# Altium PCB LEGO_VL53L1X_Sensor.PcbDoc
Units mm, origin at the board's own origin, x right, y up, seen from the top; angles counter-clockwise.
Board outline 20 x 20 mm, 2 copper layers (Top, Bottom), stack 1.036 mm thick; 56 components, 45 nets, 215 pads, 59 vias.
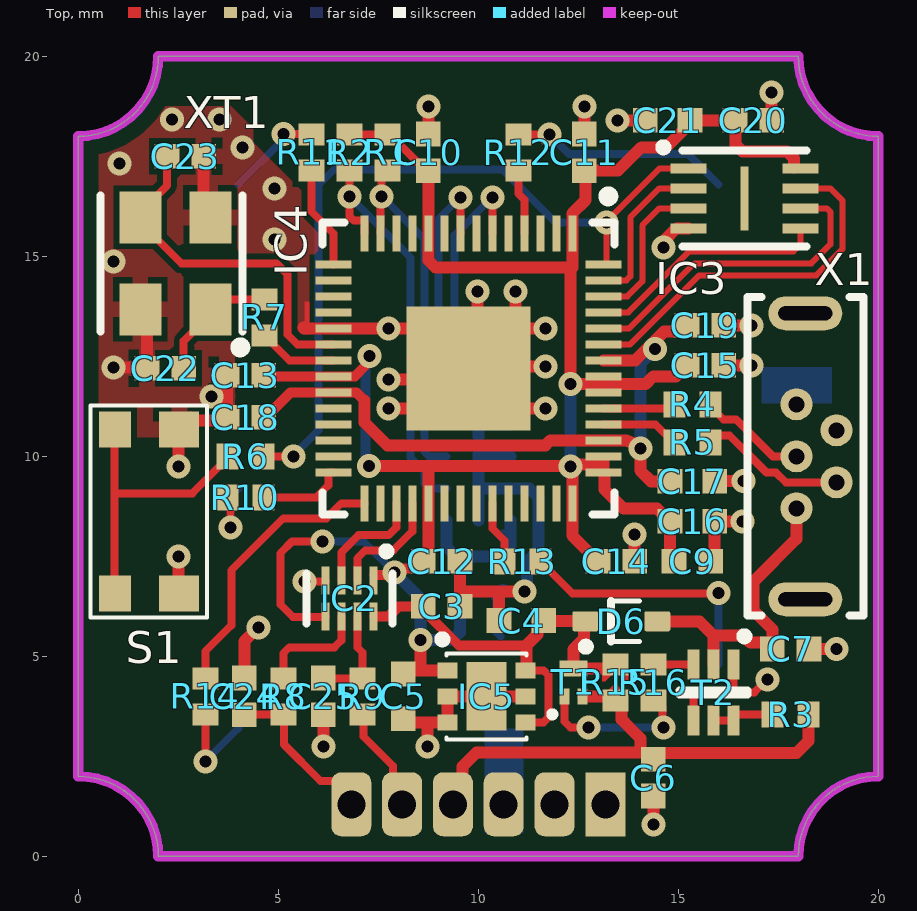
[diagram p0: Top view]
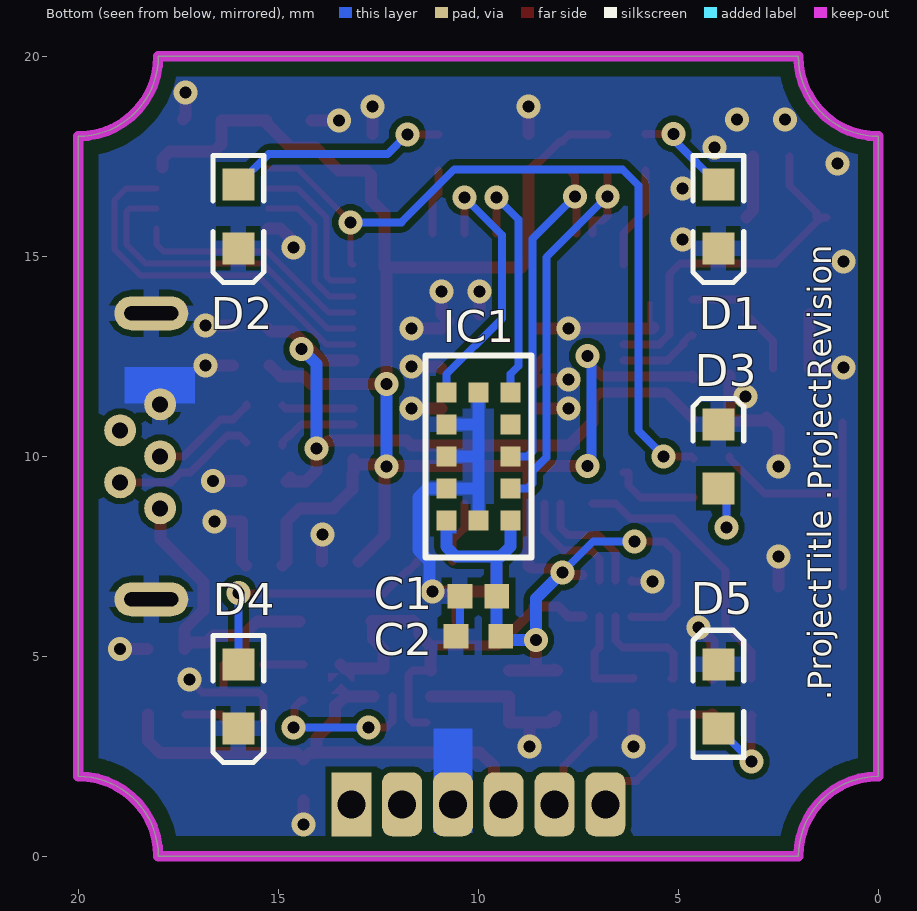
[diagram p1: Bottom view, seen from below]
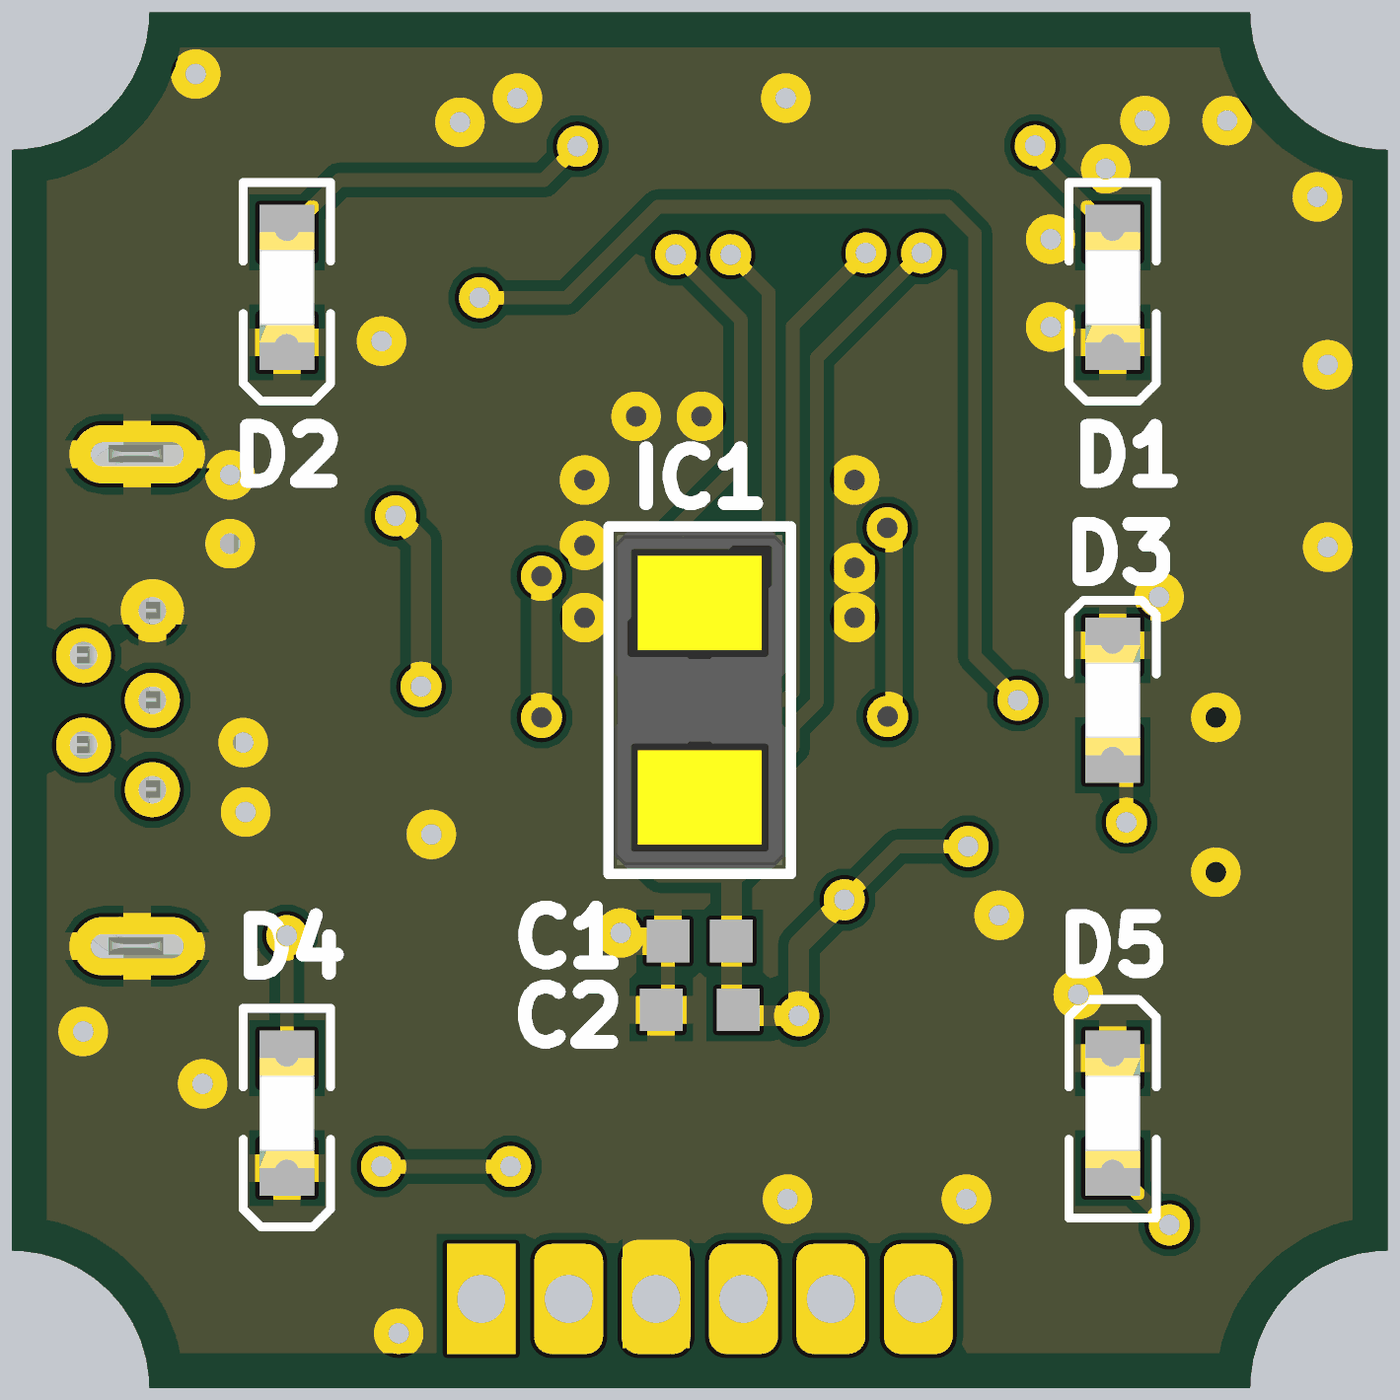
[diagram p2: 3D render of the assembled board from below, using the file's embedded part models]

## Layer stack, top to bottom
Top Solder: solder mask 0.01, Solder Resist, Dk 3.5
Top: signal copper 0.018
Dielectric 1: core 1, FR-4, Dk 4.8
Bottom: signal copper 0.018
Bottom Solder: solder mask 0.01, Solder Resist, Dk 3.5

## Board outline
0,2 0,18 ccw(c0,20) 2,20 18,20 ccw(c20,20) 20,18 20,2 ccw(c20,0) 18,0 2,0 ccw(c0,0)

## Design rules (kind name [scope] priority, off if disabled: settings)
BoardOutlineClearance BoardOutlineClearance_Overlay [OnLayer('Top Overlay')] p1: gap=0.2 ignorepadtopadclearanceinfootprint=FALSE
BoardOutlineClearance [All] p2: gap=0.5 ignorepadtopadclearanceinfootprint=FALSE
Clearance Clearance_Fiducial [HasFootprint('RefPoint_Square1mm') OR HasFootprint('RefPoint_Round1mm')] p1: gap=1.1 ignorepadtopadclearanceinfootprint=FALSE
Clearance [All] p2: gap=0.15 ignorepadtopadclearanceinfootprint=FALSE
ComponentClearance ComponentClearance_CON [HasFootprint('HDR1X2-3_5mm') or HasFootprint('HDR1X3-3_5mm')] p1: gap=0 collisioncheckmode=3 verticalgap=0 showdistances=FALSE
ComponentClearance [All] p2: gap=0.254 collisioncheckmode=3 verticalgap=0.254 showdistances=FALSE
DiffPairsRouting [All] p1: maxlimit=0.2 minlimit=0.2 mostfreqgap=0.2 toplayer_minwidth=0.2 toplayer_maxwidth=0.2 toplayer_prefwidth=0.2 bottomlayer_minwidth=0.2 bottomlayer_maxwidth=0.2 bottomlayer_prefwidth=0.2 maxuncoupledlength=12.7
HoleSize [All] p1: absolutevalues=TRUE maxlimit=12 minlimit=0.025 maxpercent=80.000 minpercent=20.000
HoleToHoleClearance mdViaViaSameLayer [All] p1: gap=0.203 allowstackedmicrovias=TRUE
HoleToHoleClearance [All] p2: gap=0.254 allowstackedmicrovias=TRUE
MinimumAnnularRing [All] p1: minimumring=0.15
MinimumSolderMaskSliver [All] p1: minsoldermaskwidth=0.05
PasteMaskExpansion mlMinCreamFrame [All] p1: expansion=0
PasteMaskExpansion [All] p2: expansion=0
PolygonConnect PolygonConnect_USB [HasFootprint('MICRO_USB_FCI')] p1: connectstyle=Direct reliefconductorwidth=0.254 reliefentries=4 polygonreliefangle="90 Angle" airgapwidth=0.254
PolygonConnect ThermalVias [IsVia] p2: connectstyle=Direct reliefconductorwidth=0.254 reliefentries=4 polygonreliefangle="90 Angle" airgapwidth=0.254
PolygonConnect [All] p3: connectstyle=Relief reliefconductorwidth=0.4 reliefentries=4 polygonreliefangle="90 Angle" airgapwidth=0.15
RoomDefinition U_power [InComponentClass('U_power')] p1: confinementstyle=ConfineIn formatcopy=TRUE lockcomponents=FALSE outline -43.125,-37.125 97.275,-37.125 97.275,117.125 -43.125,117.125
RoomDefinition U_MCU [InComponentClass('U_MCU')] p2: confinementstyle=ConfineIn formatcopy=TRUE lockcomponents=FALSE outline -51,-44 91.5,-44 91.5,111 -51,111
RoomDefinition LEGO_VL53L1X_Sensor [InComponentClass('LEGO_VL53L1X_Sensor')] p3: confinementstyle=ConfineIn formatcopy=TRUE lockcomponents=FALSE outline -54.5,-47 88,-47 88,108 -54.5,108
RoomDefinition U_VL53L1X [InComponentClass('U_VL53L1X')] p4: confinementstyle=ConfineIn formatcopy=TRUE lockcomponents=FALSE outline -46,-39.48 -46,114.5 95,114.5 95,-40.5
RoutingVias [All] p1: holewidth=0.711 width=1.27 viastyle="Through Hole" minholewidth=0.25 minwidth=0.55 maxholewidth=0.9 maxwidth=1.6
SMDEntry [All] p1 off: side=TRUE corner=TRUE anyangle=FALSE
SMDToCorner [All] p1 off: distance=59055
SilkToSilkClearance [All] p1 off: silktosilkclearance=0.05
SilkToSolderMaskClearance [IsPad] p1 off: minsilkscreentomaskgap=0.05 clearancetoexposedcopper=TRUE
SolderMaskExpansion IsVia [IsVia] p1: expansion=0.1 istentingtop=FALSE soldermaskfromhole=TRUE
SolderMaskExpansion [All] p2: expansion=0.06 istentingtop=FALSE
Width [All] p1: maxlimit=3 minlimit=0.15 preferedwidth=0.2 minimp=50.000000 maximp=50.000000 favimp=50.000000
22 further rules are at their usual default settings.

## Classes and differential pairs
component class U_power: C4 C5 C6 C7 D6 IC5 R3 R15 R16 T1 T2
differential pair class diff_90ohm: CON_USB MCU_USB
net class single_50ohm: CON_USB_N CON_USB_P MCU_USB_N MCU_USB_P
component class U_VL53L1X: C1 C2 IC1
component class U_MCU: C9 C10 C11 C12 C13 C14 C15 C16 C17 C18 C19 C20 C21 C22 C23 IC3 IC4 R1 R2 R4 R5 R6 R7 XT1
component class LEGO_VL53L1X_Sensor: C3 C24 C25 D1 D2 D3 D4 D5 IC2 R8 R9 R10 R11 R12 R13 R14 S1 X1
differential pair MCU_USB: +MCU_USB_P -MCU_USB_N
differential pair CON_USB: +CON_USB_P -CON_USB_N

## Components (designator, comment, footprint, x,y, rotation, side; value= is the part's Value field where it differs from the comment)
C1 "UniversalCapacitor" C0402 10,6.5 r180 bottom value="100nF 25V"
C2 "4.7uF/10V" C0402_big 10,5.5 r0 bottom
C3 "UniversalCapacitor" C0402 9.085,6.25 r180 top value="100nF 25V"
C4 "UniversalCapacitor" C0402_big 11.075,5.894 r180 top value=4.7uF/10V
C5 "UniversalCapacitor" C0402_big 8.125,4 r270 top value=4.7uF/10V
C6 "UniversalCapacitor" C0402 14.375,1.965 r90 top value="100nF 25V"
C7 "UniversalCapacitor" C0402 17.81,5.186 r180 top value="100nF 25V"
C9 "UniversalCapacitor" C0402 15.35,7.375 r180 top value="100nF 25V"
C10 "UniversalCapacitor" C0402 8.75,17.6 r270 top value="100nF 25V"
C11 "UniversalCapacitor" C0402 12.65,17.6 r270 top value="100nF 25V"
C12 "UniversalCapacitor" C0402 9.085,7.375 r180 top value="100nF 25V"
C13 "UniversalCapacitor" C0402 4.175,12.025 r0 top value="100nF 25V"
C14 "UniversalCapacitor" C0402 13.45,7.375 r180 top value="100nF 25V"
C15 "UniversalCapacitor" C0402 15.675,12.275 r180 top value="100nF 25V"
C16 "4.7uF/10V" C0402_big 15.35,8.375 r0 top
C17 "4.7uF/10V" C0402_big 15.35,9.375 r0 top
C18 "UniversalCapacitor" C0402 4.175,10.975 r0 top value="100nF 25V"
C19 "UniversalCapacitor" C0402 15.675,13.275 r180 top value="100nF 25V"
C20 "UniversalCapacitor" C0402 16.875,18.4 r180 top value="100nF 25V"
C21 "4.7uF/10V" C0402_big 14.735,18.4 r180 top
C22 "UniversalCapacitor" C0402 2.175,12.2 r180 top value="27pF 50V"
C23 "UniversalCapacitor" C0402 2.675,17.5 r0 top value="27pF 50V"
C24 "UniversalCapacitor" C0402 4.15,4 r90 top value="10pF / 50V"
C25 "UniversalCapacitor" C0402 6.125,4 r270 top value="10pF / 50V"
D1 "LED GREEN" LED0603 4,16 r270 bottom value=KPH-1608SGC
D2 "LED GREEN" LED0603 16,16 r270 bottom value=KPH-1608SGC
D3 "LED GREEN" LED0603 4,10 r90 bottom value=KPH-1608SGC
D4 "LED GREEN" LED0603 16,4 r270 bottom value=KPH-1608SGC
D5 "LED GREEN" LED0603 4,4 r90 bottom value=KPH-1608SGC
D6 "Diode" SOD523 13.575,5.875 r0 top value=BAS716,115
IC1 "VL53L1X" VL53L1X 10,10 r270 bottom value=VL53L1CXV0FY/1
IC2 "TXS0102DQMR" X2SON-8_1.8x1.2 6.775,6.45 r270 top
IC3 "W25Q16JV" USON-8_3x2 16.655,16.45 r0 top value=W25Q16JVUXIQ
IC4 "RP2040" QFN56 9.75,12.2 r270 top value=RP2040CT
IC5 "VoltageRegulator-Fixed08" WDFN6 10.21,4 r0 top value=NCP705MT33TCG
R1 "UniversalResistor0402" R0402 7.725,17.6 r270 top value=2k2
R2 "UniversalResistor0402" R0402 6.775,17.6 r270 top value=2k2
R3 "UniversalResistor0402" R0402 17.81,3.55 r180 top value=2k2
R4 "UniversalResistor0402" R0402 15.35,11.3 r180 top value=27R
R5 "UniversalResistor0402" R0402 15.35,10.35 r180 top value=27R
R6 "UniversalResistor0402" R0402 4.175,10 r0 top value="1k 1%"
R7 "UniversalResistor0402" R0402 4.65,13.475 r270 top value="1k 1%"
R8 "UniversalResistor0402" R0402 5.125,4 r270 top value=27R
R9 "UniversalResistor0402" R0402 7.1,4 r270 top value=27R
R10 "UniversalResistor0402" R0402 4.175,8.975 r0 top value=2k2
R11 "UniversalResistor0402" R0402 5.825,17.6 r270 top value=2k2
R12 "UniversalResistor0402" R0402 11,17.6 r270 top value=2k2
R13 "UniversalResistor0402" R0402 11.1,7.375 r180 top value=2k2
R14 "UniversalResistor0402" R0402 3.175,4 r90 top value=2k2
R15 "UniversalResistor0402" R0402 13.425,4.35 r270 top value=0R
R16 "UniversalResistor0402" R0402 14.375,4.35 r90 top value="1k 1%"
S1 "PushButton" ButtonKMR2 0.92,10.675 r0 top value="KMR211G LFS"
T1 "PNP" DFN1006-3 12.375,4.35 r90 top value=PBSS2515M
T2 "NPN_DUAL" SOT-563-6 15.875,4.1 r270 top value=EMH53T2R
X1 "USB" USB3131-XX-0230-X 18.175,10 r90 top value=USB3131-30-0230-A
XT1 "XTAL-4Pads-2Used" ABM8 2.425,14.825 r90 top value="12 MHz"

## Footprints (in the part's own frame and the unit in brackets; to place one, negate y for a bottom-side part, rotate by r counter-clockwise, add the part's x,y. Pads: shape width x height; smd on the part's side, far side on the other; paste and mask are expansions set on the pad)
ABM8 [mm]
  rect 1.3x1.05 smd paste+0 mask+0: 1(-1.15,-0.875) 2(1.15,-0.875) 3(1.15,0.875) 4(-1.15,0.875)
  silkscreen extent -2.22,-1.75 1.7,1.88, body extent -1.9,-1.5 1.9,1.5, height 0.25
ButtonKMR2 [mm]
  rect 0.8x0.9 smd: 1(0,-4.1) 1(0,0)
  rect 1x0.9 smd: 2(1.6,-4.1) 2(1.6,0)
  silkscreen extent -0.62,-4.7 2.3,0.6, body extent -0.7,-4.3 2.3,0.3, height 2.1
C0402 [mm]
  rect 0.62x0.62 smd: 1(-0.46,0) 2(0.46,0)
  body extent -0.53,-0.28 0.53,0.27, height 0.35
C0402_big [mm]
  rect 0.62x0.62 smd: 1(-0.56,0) 2(0.56,0)
  body extent -0.53,-0.28 0.53,0.27, height 0.35
DFN1006-3 [mm] "DFN1006-3, 3-Leads, Body 0,59x0,99mm, Pitch 0,65mm"
  rect 0.4x0.25 smd: 1(-0.35,0.225) 2(-0.35,-0.225)
  rect 0.4x0.7 smd: 3(0.35,0)
  silkscreen extent -0.85,0.48 -0.75,0.57, body extent -0.51,-0.32 0.51,0.32, height 0.5
LED0603 [mm] "Chip LED, 2-Leads, Body 1.6x0.8mm, IPC Medium Density"
  rect 0.8x0.8 smd: 1(-0.8,0) 2(0.8,0)
  silkscreen extent -1.52,-0.64 1.65,0.64, body extent -0.8,-0.4 0.8,0.4, height 0.7
QFN56 [mm] "QFN, 56-Leads, Body 7,00x7,00mm, Pitch 0,40mm, Thermal Pad 3,10x3,10mm, IPC Medium Density"
  rect 0.9x0.2 smd: 1(-3.375,2.6) 2(-3.375,2.2) 3(-3.375,1.8) 4(-3.375,1.4) 5(-3.375,1) 6(-3.375,0.6) 7(-3.375,0.2) 8(-3.375,-0.2) 9(-3.375,-0.6) 10(-3.375,-1) 11(-3.375,-1.4) 12(-3.375,-1.8) 13(-3.375,-2.2) 14(-3.375,-2.6) 29(3.375,-2.6) 30(3.375,-2.2) 31(3.375,-1.8) 32(3.375,-1.4) 33(3.375,-1) 34(3.375,-0.6) 35(3.375,-0.2) 36(3.375,0.2) 37(3.375,0.6) 38(3.375,1) 39(3.375,1.4) 40(3.375,1.8) 41(3.375,2.2) 42(3.375,2.6)
  rect 0.2x0.9 smd: 15(-2.6,-3.375) 16(-2.2,-3.375) 17(-1.8,-3.375) 18(-1.4,-3.375) 19(-1,-3.375) 20(-0.6,-3.375) 21(-0.2,-3.375) 22(0.2,-3.375) 23(0.6,-3.375) 24(1,-3.375) 25(1.4,-3.375) 26(1.8,-3.375) 27(2.2,-3.375) 28(2.6,-3.375) 43(2.6,3.375) 44(2.2,3.375) 45(1.8,3.375) 46(1.4,3.375) 47(1,3.375) 48(0.6,3.375) 49(0.2,3.375) 50(-0.2,3.375) 51(-0.6,3.375) 52(-1,3.375) 53(-1.4,3.375) 54(-1.8,3.375) 55(-2.2,3.375) 56(-2.6,3.375)
  rect 3.1x3.1 smd: 57(0,0)
  silkscreen extent -4.42,-3.65 3.65,3.65, body extent -3.5,-3.5 3.5,3.5, height 0.9
R0402 [mm]
  rect 0.55x0.65 smd: 1(-0.45,0) 2(0.45,0)
  body extent -0.53,-0.27 0.53,0.28, height 0.35
SOD523 [mm] "SOD-523F; 2 Leads; Body 1.3 x 0.9 mm, (LxW)"
  rrect20% 0.65x0.5 smd: 1(0.9,0) 2(-0.9,0)
  Top pour cut-out: -0.725,-0.25 -0.725,0.25 -0.525,0.45 0.525,0.45 0.725,0.25 0.725,-0.25 0.525,-0.45 -0.525,-0.45
  silkscreen extent -0.99,-0.73 0.45,0.51, body extent -0.85,-0.45 0.85,0.45, height 0.7
SOT-563-6 [mm] "SOT-563, 6-Leads, Body 1,60x1,60mm, Pitch 0,50mm, IPC Medium Density"
  rect 0.75x0.3 smd: 1(-0.7,0.5) 2(-0.7,0) 3(-0.7,-0.5) 4(0.7,-0.5) 5(0.7,0) 6(0.7,0.5)
  silkscreen extent -1.5,-0.85 0.05,0.87, body extent -0.8,-0.85 0.8,0.85, height 0.6
USB3131-XX-0230-X [mm] "Micro USB Receptacle, Type B, Through-Hole, Vertical, with 2.3mm Shell Stakes"
  round 0.8 hole 0.4: 1(-1.3,0.22) 2(-0.65,-0.78) 3(0,0.22) 4(0.65,-0.78) 5(1.3,0.22)
  oval 0.85x1.85 hole 0.35 slot 1.35 at 90 deg: 6(-3.575,0) 6(3.575,0)
  silkscreen extent -3.98,-1.45 3.98,1.45, body extent -3.97,-1.47 3.98,1.47, height 5.64
USON-8_3x2 [mm]
  rect 0.9x0.25 smd: 1(-1.395,0.75) 2(-1.395,0.25) 3(-1.395,-0.25) 4(-1.395,-0.75) 5(1.395,-0.75) 6(1.395,-0.25) 7(1.395,0.25) 8(1.395,0.75)
  rect 0.2x1.6 smd: 9(0,0)
  silkscreen extent -2.13,-1.2 1.55,1.37, body extent -1.55,-1.05 1.55,1.05, height 0.6
VL53L1X [mm]
  rect 0.5x0.5 smd: 1(1.6,-0.8) 2(0.8,-0.8) 3(0,-0.8) 4(-0.8,-0.8) 5(-1.6,-0.8) 6(-1.6,0) 7(-1.6,0.8) 8(-0.8,0.8) 9(0,0.8) 10(0.8,0.8) 11(1.6,0.8) 12(1.6,0)
  Top region: 1.825,-0.55 1.925,-0.55 1.925,-0.8 1.825,-0.8
  silkscreen extent -2.52,-1.33 2.52,1.33, body extent -2.45,-1.25 2.45,1.25, height 1.55
WDFN6 [mm] "WDFN6, 6-Leads, Body 2,00x2,00mm, Pitch 0,65mm, Thermal Pad 1,60x0,74mm, IPC Low Density"
  rect 0.5x0.4 smd: 1(-0.975,0.65) 2(-0.975,0) 3(-0.975,-0.65) 4(0.975,-0.65) 5(0.975,0) 6(0.975,0.65)
  rect 1x1.72 smd: 7(0,0)
  silkscreen extent -1.21,-1.07 1,1.52, body extent -1,-1 1,1, height 0.8
X2SON-8_1.8x1.2 [mm] "X2SON, 8-Leads, Body 1,80x1,20mm, Pitch 0,40mm, IPC Medium Density"
  rect 0.7x0.2 smd mask+0.05: 1(-0.45,0.6) 2(-0.45,0.2) 3(-0.45,-0.2) 4(-0.45,-0.6) 5(0.45,-0.6) 6(0.45,-0.2) 7(0.45,0.2) 8(0.45,0.6)
  silkscreen extent -1.27,-1.08 0.63,1.07, body extent -0.63,-0.92 0.63,0.92, height 0.4

## Part data
C1 C3 C6 C7 C9 C10 C11 C12 C13 C14 C15 C18 C19 C20: library part 0402B104K250CT, "WALSIN - 0402B104K250CT - CAPACITOR, MLCC, X7R, 0.1UF, 25V, 0402", Supplier Part Number 1=2496772, ComponentLink1URL=http://cz.farnell.com/2496772?Ntt=2496772, footprint_name=C0402, HelpURL=http://www.farnell.com/datasheets/2340522.pdf, name=0402B104K250CT, part_id=2099, schematic_name=UniversalCapacitor, Supplier 1=Farnell
C2 C4 C5 C16 C17 C21: library part GRM155R61A475MEAAD, "MURATA - GRM155R61A475MEAAD - CAP, MLCC, X5R, 4.7UF, 10V, 0402", Supplier Part Number 1=2688503, ComponentLink1URL=http://cz.farnell.com/2688503?Ntt=2688503, footprint_name=C0402_big, HelpURL=http://www.farnell.com/datasheets/2189109.pdf, name=GRM155R61A475MEAAD, part_id=2175, schematic_name=UniversalCapacitor, Supplier 1=Farnell
C22 C23: library part 0402N270J500CT, "WALSIN - 0402N270J500CT - CAPACITOR, MLCC, NP0, 27PF, 50V, 0402", Supplier Part Number 1=2496801, ComponentLink1URL=http://cz.farnell.com/2496801?Ntt=2496801, footprint_name=C0402, HelpURL=http://www.farnell.com/datasheets/2340522.pdf, name=0402N270J500CT, part_id=2100, schematic_name=UniversalCapacitor, Supplier 1=Farnell
C24 C25: library part C0402C100D5GAC, "Kategorie produktu:	Vícevrstvé keramické kondenzátory MLCC – pro povrchovou montáž SMD, SMT	 / Výrobce:	KEMET	 / RoHS::	V souladu RoHS Údaje	 / Série:	C-C	 / Kapacita:	10 pF	 / Jmenovité napětí (DC) stejnosměrného proudu	:	50 VDC	 / Dielektrikum:	C0G (NP0)	 / Tolerance:	0.5 pF	 / Kód pouzdra - palce:	0402	 / Kód pouzdra - mm:	1005	 / Výška:	-	 / Maximální provozní teplota:	+ 125 C	 / Minimální provozní teplota:	- 55 C	 / Koncovka:	-	 / Výrobek:	General Type MLCCs	 / Obal:	Cut Tape	 / Obal:	MouseReel	 / Obal:	Ree", Supplier Part Number 1=80-C0402C100D5GAC, ComponentLink1URL=https://cz.mouser.com/ProductDetail/KEMET/C0402C100D5GAC/?qs=sGAEpiMZZMu0f%252bT2bkVfuj0aSb%252bMTiHU, footprint_name=C0402, HelpURL=http://www.mouser.com/ds/2/212/KEM_C1003_C0G_SMD-1101588.pdf, name=C0402C100D5GAC, part_id=2258, schematic_name=UniversalCapacitor, Supplier 1=Mouser
D1 D2 D3 D4 D5: library part KPH-1608SGC, "KINGBRIGHT - KPH-1608SGC - LED, GREEN, 12MCD, 568NM, SMD LED 0603 zelená", Supplier Part Number 1=2426215, ComponentLink1URL=http://cz.farnell.com/2426215?Ntt=2426215, footprint_name=LED0603, HelpURL=http://www.farnell.com/datasheets/1821279.pdf, name=KPH-1608SGC, part_id=980, schematic_name=LED, Supplier 1=Farnell
D6: library part BAS716,115, "NEXPERIA - BAS716,115 - Small Signal Diode, Single, 85 V, 200 mA, 1.25 V, 3 µs, 4 A", Supplier Part Number 1=8734500, ComponentLink1URL=http://cz.farnell.com/8734500?Ntt=8734500, footprint_name=SOD523, HelpURL=http://www.farnell.com/datasheets/674433.pdf, name=BAS716,115, part_id=2944, schematic_name=Diode, Supplier 1=Farnell
IC1: library part VL53L1CXV0FY/1, "STMICROELECTRONICS - VL53L1CXV0FY/1 - Proximity Sensor, I2C, 4000 mm, OLGA, 12 Pins, 2.6 V, 3.5 V", Supplier Part Number 1=2851946, ComponentLink1URL=http://cz.farnell.com/2851946?Ntt=2851946, footprint_name=VL53L1X, HelpURL=http://www.farnell.com/datasheets/2600105.pdf, name=VL53L1CXV0FY/1, part_id=2672, schematic_name=VL53L1X, Supplier 1=Farnell
IC2: "TEXAS INSTRUMENTS - TXS0102DQMR - Voltage Level Translator, 2 Inputs, 4.2ns, 1.65V to 5.5V, X2SON-8", Supplier Part Number 1=3050430, ComponentLink1URL=http://cz.farnell.com/3050430?Ntt=3050430, footprint_name=X2SON-8_1.8x1.2, name=TXS0102DQMR, part_id=2969, schematic_name=TXS0102DQMR, Supplier 1=Farnell
IC3: library part W25Q16JVUXIQ, "Flash NOR spiFlash, 3V, 16M-bit, 4Kb Uniform Sector, DTR", Supplier Part Number 1=454-W25Q16JVUXIQTR, ComponentLink1URL=https://cz.mouser.com/ProductDetail/Winbond/W25Q16JVUXIQ-TR?qs=qSfuJ%252Bfl%2Fd7SDdIHLGOd1g%3D%3D, footprint_name=USON-8_3x2, HelpURL=https://cz.mouser.com/datasheet/2/949/w25q16jv_spi_revg_03222018_plus-1489727.pdf, name=W25Q16JVUXIQ, part_id=2967, schematic_name=W25Q16JVUXIQ, Supplier 1=Mouser
IC4: library part RP2040CT, "RASPBERRY-PI - RP2040CT - ARM MCU, RP2040 Series Microcontrollers, ARM Cortex-M0+, 32bit, 133 MHz, 16 MB, 264 KB", Supplier Part Number 1=3766082, ComponentLink1URL=http://cz.farnell.com/3766082?Ntt=3766082, footprint_name=QFN56, HelpURL=http://www.farnell.com/datasheets/3213406.pdf, name=RP2040CT, part_id=2966, schematic_name=RP2040, Supplier 1=Farnell
IC5: library part NCP705MT33TCG, "Regulátory napětí s nízkým úbytkem (LDO) 500 MA LDO ULTRA-LOW IQ", Supplier Part Number 1=863-NCP705MT33TCG, ComponentLink1URL=https://cz.mouser.com/ProductDetail/onsemi/NCP705MT33TCG?qs=l5F7KFZg3O5BAqXCIJeMgQ%3D%3D, footprint_name=WDFN6, HelpURL=https://cz.mouser.com/datasheet/2/308/NCP705_D-1812761.pdf, name=NCP705MT33TCG, part_id=2970, schematic_name=VoltageRegulator-Fixed08, Supplier 1=Mouser
R1 R2 R3 R10 R11 R12 R13 R14: library part CRCW04022K20FKED, "VISHAY - CRCW04022K20FKED. - RES, THICK FILM, 2K2, 1%, 0.063W, 0402", Supplier Part Number 1=2140802, ComponentLink1URL=http://cz.farnell.com/2140802?Ntt=2140802, HelpURL=http://www.farnell.com/datasheets/2310790.pdf, name=CRCW04022K20FKED, Supplier 1=Farnell
  R1 R2 R3: footprint_name=R0402, part_id=2177, schematic_name=UniversalResistor0402
R4 R5 R8 R9: library part CRCW040227R0FKED, "VISHAY - CRCW040227R0FKED. - SMD Chip Resistor, 27 ohm, ± 1%, 62.5 mW, 0402 [1005 Metric], Thick Film, General Purpose", Supplier Part Number 1=2140614, ComponentLink1URL=http://cz.farnell.com/2140614?Ntt=2140614, HelpURL=http://www.farnell.com/datasheets/2310790.pdf, name=CRCW040227R0FKED, Supplier 1=Farnell
  R4 R5: footprint_name=R0402, part_id=2830, schematic_name=UniversalResistor0402
R6 R7 R16: library part CRCW04021K00FKED, "VISHAY - CRCW04021K00FKED - RES, THICK FILM, 1K, 1%, 0.063W, 0402", Supplier Part Number 1=1469662, ComponentLink1URL=http://cz.farnell.com/1469662?Ntt=1469662, footprint_name=R0402, HelpURL=http://www.farnell.com/datasheets/2310790.pdf, name=CRCW04021K00FKED, part_id=2180, schematic_name=UniversalResistor0402, Supplier 1=Farnell
R15: library part CRCW04020000Z0ED, "VISHAY - CRCW04020000Z0ED - RESISTOR, 0R, 0.063W, JUMPER, 0402, SMD", Supplier Part Number 1=1469661, ComponentLink1URL=http://cz.farnell.com/1469661?Ntt=1469661, HelpURL=http://www.farnell.com/datasheets/2310790.pdf, name=CRCW04020000Z0ED, Supplier 1=Farnell
S1: library part "KMR211G LFS", "C & K COMPONENTS - KMR211G LFS - SWITCH, SPST, 0.05A, 32VDC, SMD", Supplier Part Number 1=1437635, ComponentLink1URL=http://cz.farnell.com/1437635?Ntt=1437635, footprint_name=ButtonKMR2, HelpURL=http://www.farnell.com/datasheets/1697814.pdf, name="KMR211G LFS", part_id=1256, schematic_name=PushButton, Supplier 1=Farnell
T1: library part PBSS2515M,315, "NEXPERIA - PBSS2515M,315 - TRANSISTOR, BIPOLAR", Supplier Part Number 1=771-PBSS2515M315, ComponentLink1URL=https://cz.mouser.com/ProductDetail/Nexperia/PBSS2515M315?qs=LOCUfHb8d9svQrHgrvn9Qw%3D%3D, HelpURL=https://4donline.ihs.com/images/VipMasterIC/IC/PIRS/PIRSS00607/PIRSS00607-1.pdf?hkey=6D3A4C79FDBF58556ACFDE234799DDF0, name=PBSS2515M,315, Supplier 1=Mouser
T2: library part EMH53T2R, "ROHM - EMH53T2R - Bipolar Pre-Biased / Digital Transistor, Dual NPN, 50 V, 100 mA, 4.7 kohm", Supplier Part Number 1=3757495, ComponentLink1URL=http://cz.farnell.com/3757495?Ntt=3757495, footprint_name=SOT-563-6, HelpURL=http://www.farnell.com/datasheets/3209004.pdf, name=EMH53T2R, part_id=2971, schematic_name=NPN_DUAL, Supplier 1=Farnell
X1: library part USB3131-30-0230-A, "GCT (GLOBAL CONNECTOR TECHNOLOGY) - USB3131-30-0230-A - USB Connector, Micro USB Type B, USB 2.0, Receptacle, 5 Ways, Through Hole Mount, Vertical", Supplier Part Number 1=2537022, ComponentLink1Description=http://www.farnell.com/datasheets/1359588.pdf, ComponentLink1URL=http://cz.farnell.com/2537022?Ntt=2537022, ComponentLink2Description=http://www.adam-tech.com/rick/FinalSingle/CatPg133-134.pdf, ComponentLink2URL=http://www.adam-tech.com/rick/FinalSingle/CatPg133-134.pdf, footprint_name=USB3131-XX-0230-X, HelpURL=http://www.farnell.com/datasheets/2342944.pdf, name=USB3131-30-0230-A, part_id=2968, Pricing="1=20,954, 100=15,959, 250=14,315, 500=13,066, 1000=12,031 (EUR)", schematic_name=MUSB, Supplier 1=Farnell
XT1: library part ABM8-12.000MHZ-B2-T, "Krystaly 12.0 MHZ 18PF 20PPM 120OHM", Supplier Part Number 1=815-ABM8-12-B2-T, ComponentLink1URL=https://cz.mouser.com/ProductDetail/ABRACON/ABM8-12.000MHZ-B2-T?qs=hjiqo2PPvpiyy6%252BNWm3IZg%3D%3D, footprint_name=ABM8, HelpURL=https://cz.mouser.com/datasheet/2/3/abm8-1384678.pdf, name=ABM8-12.000MHZ-B2-T, part_id=1039, schematic_name=XTAL-4Pads-2Used, Supplier 1=Mouser

## Free pads (board coordinates)
  rrect50% 1x1.6 hole 0.7: "	"(6.825,1.3) "	"(8.095,1.3) "	"(9.365,1.3) "	"(10.635,1.3) "	"(11.905,1.3)
  rect 1x1.6 hole 0.7: "	"(13.175,1.3)

## Via types
v1: diameter 0.6, hole 0.3, Top to Bottom, 59 vias

## Nets (pads, with @x,y where several pads share a name; then routed paths per layer and width w, separated by ;. In a path a pad name is that pad's centre, name@x,y a point inside that pad or via, vN(x,y) a via of type N, cw(c..) or ccw(c..) an arc to the next point about the centre after c; other vN are vias at no path point)
1V1: C17.1 C18.2 C19.2 IC4.23 IC4.45 IC4.50 | length 17.5
  Top w0.25: C18.2@4.635,10.925 5.31,11.6 IC4.23 6.949,11.6 7.15,11.399
  Top w0.3: 7.15,11.399 7.15,10.851 7.726,10.275 11.675,10.275 11.8,10.4 IC4.45 13.155,10.4 13.699,10.4 ccw(c13.853,10.657) 13.765,10.371 cw(c13.567,9.717) v1(14.05,10.2) ; IC4.50 13.927,12.4 v1@14.314,12.787 ; v1(14.05,10.2) 14.05,9.643 14.318,9.375 C17.1 C17.1@14.698,9.467 ; v1(14.42,12.681) v1@14.314,12.787 ; C19.2@15.26,13.2 15.175,13.115 14.642,13.115 v1@14.314,12.787
  Bottom w0.3: v1(14.05,10.2) 14.05,12.311 v1(14.42,12.681)
3V3: C1.2 C2.1 C5.1 C9.2 C10.2 C11.2 C12.2 C13.2 C14.2 C15.2 C16.1 C20.2 C21.1 IC1.1 IC1.11 IC2.1 IC2.5 IC3.8 IC4.1 IC4.10 IC4.22 IC4.33 IC4.42 IC4.43 IC4.44 IC4.48 IC4.49 IC5.1 R1.1 R2.1 | length 63.5
  Top w0.2: v1(6.1,7.875) 6.092,7.867 5.342,7.867 5.05,7.575 5.05,6.3 5.361,5.989 6.175,5.989 IC2.5 ; R2.1 R1.1 7.9,17.875 7.957,17.875 8.482,17.35 8.544,17.35 C10.2@8.75,17.144
  Top w0.25: C13.2@4.66,12 IC4.22 6.914,12 7.208,12.294 7.208,12.438 v1(7.275,12.505) ; IC2.1@7.4,7.033 7.958,7.033 7.958,7.063 8.085,7.19 8.68,7.19 C12.2@8.75,7.26
  Top w0.3: C13.2@4.635,11.975 C13.2@4.66,12 ; v1(7.27,9.764) 8.75,9.764 ; C5.1@8.035,4.65 IC5.1 ; C5.1@8.082,4.65 C5.1@8.106,4.674 ; 8.556,4.674 8.556,5.409 v1(8.56,5.413) ; C12.2@8.75,7.26 IC4.33 8.75,9.764 ; C10.2@8.775,17.125 8.75,17.1 IC4.10 8.75,14.901 8.926,14.725 12.35,14.725 IC4.1 12.35,16.075 12.679,16.404 12.679,17.019 12.8,17.14 13.49,17.14 14.075,17.725 14.695,17.725 C21.1@15.37,18.4 ; v1(12.3,11.803) 12.3,14.725 ; v1@12.35,11.803 14.179,11.803 14.376,12 14.94,12 C15.2 ; C14.2 12.35,8.015 12.35,9.7 v1(12.3,9.75) ; IC4.44@13.125,9.925 13.125,9.8 ; C16.1@14.79,8.275 14.79,7.375 C9.2@14.89,7.275 ; C16.1 14.465,8.7 13.625,8.7 13.149,9.176 13.149,9.576 IC4.43 13.125,9.8 ; C21.1 C21.1@15.37,18.4 ; IC3.8@17.892,17.225 17.892,17.449 17.716,17.625 16.601,17.625 16.425,17.801 16.425,18.39 C20.2 C21.1@15.37,18.4 ; 8.75,9.764 12.286,9.764 v1(12.3,9.75) ; v1(12.3,9.75) 12.35,9.8 13.125,9.8
  Bottom w0.2: v1(6.1,7.875) 7.125,7.875 v1(7.9,7.1)
  Bottom w0.25: v1@7.203,9.831 v1(7.27,9.764) ; v1@7.237,9.798 7.175,9.86 7.175,12.405 v1(7.275,12.505)
  Bottom w0.3: v1(7.9,7.1) 8.56,6.44 v1(8.56,5.413) 9.353,5.413 9.54,5.6 C1.2 9.54,7.5 ; IC1.11 9.2,7.74 9.44,7.5 9.54,7.5 ; IC1.1 10.8,7.74 10.56,7.5 9.54,7.5 ; v1(12.3,9.75) v1(12.3,11.803)
5V: C3.2 C4.1 D6.2 IC2.8 IC5.4 IC5.6 R15.1 T1.3 | length 11.3
  Top w0.2: IC5.4@11.3,3.35 11.633,3.35 11.75,3.467 11.75,4.533 11.633,4.65 IC5.6@11.3,4.65
  Top w0.25: IC2.8@7.4,6 7.759,6 8.009,6.25 C3.2 8.625,6.161 9.514,5.272 11.2,5.272
  Top w0.3: IC5.6 11.2,4.665 11.2,5.272 11.475,5.547 11.475,5.734 C4.1 11.644,5.884 12.666,5.884 D6.2 12.639,5.839 12.639,5.439 12.375,5.175 T1.3 13.35,4.7 R15.1@13.45,4.8
5V_USB: C7.2 D6.1 T2.2 X1.1 | length 8
  Top w0.3: D6.1 15.525,5.875 15.875,5.525 ; T2.2 15.875,5.525 ; X1.1 17.951,8.696 17.951,7.935 16.875,6.859 16.875,6.15 17.35,5.675 C7.2 17.19,5.346 16.804,5.346 16.625,5.525 15.875,5.525
BOOT_SEL: R6.1 S1.1 | length 7.3
  Top w0.2: S1.1@0.9,6.75 0.9,9.075 ; S1.1@0.9,10.85 0.9,9.075 ; R6.1 3.725,9.95 2.85,9.075 0.9,9.075
CON_USB_N: R5.1 X1.2 | length 3.7
  Top w0.2: R5.1 15.975,10.525 16.275,10.525 17.201,9.599 17.437,9.599 17.686,9.35 18.25,9.35 X1.2
CON_USB_P: R4.1 X1.3 | length 2.9
  Top w0.2: R4.1 15.8,11.25 16.125,10.925 16.441,10.925 17.367,9.999 17.762,9.999 17.894,10.131 X1.3@18,10.025
GND: "pad.	"@10.635,1.3 C1.1 C2.2 C3.1 C4.2 C5.2 C6.1 C7.1 C9.1 C10.1 C11.1 C12.1 C13.1 C14.1 C15.1 C16.2 C17.2 C18.1 C19.1 C20.1 C21.2 C22.2 C23.2 C24.2 C25.2 D1.2 D2.2 D3.2 D4.2 D5.2 IC1.2 IC1.3 IC1.4 IC1.6 IC1.12 IC2.4 IC3.4 IC4.19 IC4.57 IC5.2 IC5.3 IC5.5 IC5.7 S1.2 T2.1 T2.4 X1.5 X1.6 XT1.2 XT1.4 | length 50.2
  Top w0.2: v1(5.65,6.875) 6.175,6.875 IC2.4 ; T2.4 15.375,3.983 15.492,4.1 16.375,4.1 ; T2.1 16.375,4.1 ; v1(17.225,4.425) 16.9,4.1 16.375,4.1
  Top w0.3: v1@1.025,12.225 C22.2@1.715,12.225 ; C22.2 C22.2@1.715,12.225 ; XT1.4@1.715,13.56 C22.2@1.715,12.225 ; S1.2@2.5,6.75 v1(2.5,7.5) ; v1(2.5,9.75) 2.5,10.675 S1.2@2.8,10.975 ; S1.2@2.81,10.9 C18.1@3.725,10.9 ; C23.2 3.135,16.14 XT1.2 ; v1(3.325,11.5) 3.333,11.492 3.715,11.492 ; C18.1 3.715,11.492 ; C13.1 3.715,11.492 ; C24.2 4.15,5.375 v1(4.5,5.725) ; 5.625,13.216 5.641,13.2 IC4.19 v1(7.75,13.2) IC4.57@8.575,13.2 ; v1(6.125,2.75) C25.2 ; v1(7.75,11.2) IC4.57@8.575,11.2 ; v1(7.75,11.925) 8.5,11.925 IC4.57@8.575,11.85 ; C5.2@8.075,3.49 C5.2 ; C5.2@8.1,3.395 C5.2@8.106,3.389 ; C5.2@8.15,3.44 8.24,3.35 8.725,3.35 ; IC4.57@8.35,12.45 8.575,12.225 IC4.57@8.575,12.2 ; v1(8.725,2.75) 8.725,3.35 ; C10.1 v1(8.75,18.75) ; C3.1 9.545,6.618 ; C12.1@9.545,7.26 9.545,6.618 ; IC4.57@9.975,13.55 v1(9.975,14.125) ; C4.2 10.515,6.578 ; IC4.57@10.75,13.375 10.925,13.55 v1(10.925,14.125) ; IC4.57@10.925,11.2 v1(11.675,11.2) ; IC4.57@10.925,12.2 10.975,12.25 v1(11.675,12.25) ; IC4.57@10.925,13.2 v1(11.675,13.2) ; v1(11.149,6.618) 9.545,6.618 ; IC5.5 IC5.7 IC5.2 IC5.3 8.725,3.35 ; C11.1 v1(12.65,18.75) ; v1(13.485,18.4) C21.2 ; v1(13.9,8.05) 13.905,8.045 13.905,7.38 C14.1 ; v1(14.375,0.8) C6.1@14.375,1.4 ; v1(14.625,15.219) 14.682,15.276 14.682,15.432 14.951,15.7 IC3.4 ; C9.1@15.81,7.275 15.91,7.375 C16.2@15.91,8.275 ; C16.2 v1(16.6,8.375) ; C17.2@15.92,9.385 v1(16.635,9.385) ; C15.1 v1(16.825,12.275) ; C19.1 v1(16.825,13.275) ; v1(17.325,19.1) 17.325,18.485 C20.1@17.387,18.423 ; C7.1 v1(18.96,5.186)
  Bottom w0.2: C1.1 10.46,5.6 C2.2
  Bottom w0.3: IC1.12 10,9.2 ; IC1.6 10,10.8 ; C1.1 C1.1@10.62,6.66 ; IC1.3 10,10 ; IC1.4 10,10.8 ; v1(11.149,6.618) 11.22,6.689 11.22,7.373 11.5,7.653 11.5,8.975 11.275,9.2 IC1.2 10,9.2 ; 10,9.2 10,10 ; 10,10 10,10.8
  other v1: 0.875,12.225 0.875,14.875 4.9,15.425 4.9,16.7 1.025,17.315 4.1,17.725 2.337,18.423 3.53,18.423
I2C_SCK: IC1.10 IC4.14 R2.2 | length 10.4
  Top w0.2: R2.2 6.775,16.009 6.892,15.891 7.15,15.891 IC4.14
  Bottom w0.2: v1(6.775,16.5) 8.3,14.975 8.3,9.972 8.65,9.622 8.65,9.317 8.767,9.2 IC1.10
I2C_SDA: IC1.9 IC4.13 R1.2 | length 9.1
  Top w0.2: IC4.13 7.55,16.465 v1(7.585,16.5) 7.585,17.01 R1.2
  Bottom w0.2: v1(7.585,16.5) 8.65,15.435 8.65,10.117 8.767,10 IC1.9
Laser_XSHUT: IC1.5 IC4.6 | length 6.7
  Top w0.2: IC4.6 v1(10.35,16.475)
  Bottom w0.2: v1(10.35,16.475) 9.403,15.528 9.403,13.448 10.8,12.05 IC1.5
LaserInt: IC1.7 IC4.8 | length 6.1
  Top w0.2: IC4.8 v1(9.55,16.475)
  Bottom w0.2: IC1.7 9.2,12.053 9,12.253 9,15.925 v1(9.55,16.475)
LEGO_RX: "pad.	"@6.825,1.3 C24.1 R8.2 | length 4.1
  Top w0.2: C24.1@4.155,3.545 R8.2@5.12,3.545 ; R8.2@5.145,3.545 5.145,2.794 6.05,1.889 6.436,1.889 6.825,1.5 6.825,1.3
  Top w0.3: C24.1 C24.1@4.155,3.545 ; R8.2@5.12,3.545 R8.2
LEGO_TX: "pad.	"@8.095,1.3 R9.2 | length 2.7
  Top w0.2: R9.2@7.125,3.55 7.125,3 7.871,2.254 7.871,1.524 8.095,1.3
LEGO_VCC: "pad.	"@9.365,1.3 C6.2 R3.1 R15.2 T1.2 | length 13
  Top w0.3: 9.365,1.3 9.607,1.542 9.607,2.247 9.96,2.6 C6.2@14.085,2.6 ; T1.2@12.625,4 13.325,4 13.55,3.775 13.581,3.775 13.581,3.42 13.776,3.225 14.051,2.951 14.051,2.749 ; C6.2@14.1,2.585 14.215,2.585 C6.2 14.535,2.585 17.96,2.585 18.26,2.885 R3.1
MCU_QSPI_SCLK: IC3.6 IC4.52 | length 8.1
  Top w0.15: IC4.52 13.773,13.2 15.399,14.826 18.324,14.826 18.8,15.301 18.8,16.112 18.712,16.2 IC3.6
MCU_QSPI_SD0: IC3.5 IC4.53 | length 6
  Top w0.15: IC4.53 13.749,13.6 15.274,15.126 17.876,15.126 18.05,15.3 IC3.5
MCU_QSPI_SD1: IC3.2 IC4.55 | length 4
  Top w0.15: IC4.55 13.7,14.4 13.8,14.5 13.8,15.975 14.525,16.7 IC3.2
MCU_QSPI_SD2: IC3.3 IC4.54 | length 3.9
  Top w0.15: IC4.54 13.724,14 14.1,14.376 14.1,15.775 14.525,16.2 IC3.3
MCU_QSPI_SD3: IC3.7 IC4.51 | length 9.4
  Top w0.15: IC4.51 13.797,12.8 15.523,14.526 18.449,14.526 19.1,15.177 19.1,16.4 18.8,16.7 IC3.7
MCU_QSPI_SS_N: IC3.1 IC4.56 R6.2 | length 19.5
  Top w0.15: IC4.56 13.175,14.8 13.2,14.825 13.2,15.868 14.532,17.2 IC3.1
  Top w0.2: R6.2@4.625,9.95 4.675,10 v1(5.375,10)
  Bottom w0.2: v1(5.375,10) 5.375,10.017 6,10.642 6,16.775 6.4,17.175 10.6,17.175 11.925,15.85 v1(13.2,15.85)
MCU_SWCLK: IC4.24
MCU_SWDIO: IC4.25
MCU_USB_N: IC4.46 R5.2 | length 2
  Top w0.2: IC4.46 14.425,10.8 14.7,10.525 14.725,10.525 R5.2 R5.2@14.9,10.275
MCU_USB_P: IC4.47 R4.2 | length 1.8
  Top w0.2: IC4.47 14.825,11.2 R4.2@14.9,11.275
MCU_XIN: C23.1 IC4.20 XT1.3 | length 9
  Top w0.2: XT1.3@1.3,15.975 XT1.3@1.425,15.975 ; XT1.3@1.488,15.913 2.575,14.825 4.951,14.825 5.225,14.551 5.225,13.05 5.475,12.8 IC4.20 ; XT1.3 1.55,16.1 2.215,16.765 C23.1
MCU_XOUT: IC4.21 R7.2 | length 2
  Top w0.2: R7.2 4.7,13.025 4.875,12.85 4.875,12.8 5.275,12.4 IC4.21
NetC22_1: C22.1 R7.1 XT1.1 | length 3.4
  Top w0.2: C22.1 2.635,12.885 3.3,13.55 3.3,13.925 R7.1
NetC25_1: C25.1 IC2.7 R9.1 | length 2.6
  Top w0.2: C25.1 6.135,4.45 R9.1 7.1,5.1 6.975,5.225 IC2.7
NetD1_1: D1.1 R11.1 | length 2.4
  Top w0.2: v1(5.125,18.06) 5.13,18.055 5.82,18.055 R11.1
  Bottom w0.2: D1.1 5.048,17.848 5.048,17.983 v1(5.125,18.06)
NetD2_1: D2.1 R12.1 | length 5.5
  Top w0.2: R12.1 v1(11.775,18.05)
  Bottom w0.2: v1(11.775,18.05) 12.265,17.56 15.24,17.56 D2.1
NetD3_1: D3.1 R10.1 | length 1.8
  Top w0.2: R10.1@3.725,8.925 R10.1@3.763,8.887 ; v1@3.763,8.262 v1(3.8,8.225) R10.1@3.8,8.85
  Bottom w0.2: v1(3.8,8.225) 3.8,9 D3.1
NetD4_1: D4.1 R13.1 | length 6.6
  Top w0.2: R13.1 11.55,7.325 11.725,7.15 11.775,7.15 12.35,6.575 15.997,6.575 v1(16,6.578)
  Bottom w0.2: D4.1 v1(16,6.578)
NetD5_1: D5.1 R14.1 | length 2.4
  Top w0.2: R14.1@3.15,3.525 R14.1 v1(3.175,2.375)
  Bottom w0.2: v1(3.175,2.375) D5.1
NetIC2_6: IC2.6 R8.1 | length 2.9
  Top w0.2: R8.1@5.175,4.45 R8.1 5.125,5.075 5.275,5.225 6.4,5.225 6.575,5.4 IC2.6
NetR3_2: R3.2 T2.5 T2.6 | length 1.6
  Top w0.2: T2.5 T2.6 16.375,3.5 16.425,3.55 R3.2@17.325,3.55
NetR16_1: R16.1 T1.1 | length 4
  Top w0.2: T1.1 12.15,3.375 12.3,3.225 v1(12.75,3.225) ; R16.1 14.425,3.9 14.6,3.725 14.6,3.25 v1(14.625,3.225)
  Bottom w0.2: v1(12.75,3.225) v1(14.625,3.225)
NetR16_2: R16.2 T2.3 | length 1
  Top w0.2: R16.2 T2.3
SENSOR_RX: IC2.2 IC4.32 | length 2.9
  Top w0.2: IC2.2 6.975,7.45 7.175,7.65 7.875,7.65 8.35,8.125 IC4.32
SENSOR_TX: IC2.3 IC4.31 | length 2.9
  Top w0.2: IC2.3 6.575,7.595 7.01,8.03 7.76,8.03 7.95,8.22 IC4.31
STATUS_Led: IC4.28 R10.2 | length 2.2
  Top w0.2: R10.2 5.95,8.975 6.25,9.275 6.25,9.6 IC4.28
User_Led1: IC4.15 R11.2 | length 2.6
  Top w0.2: R11.2 5.825,16.125 6.375,15.575 IC4.15
User_Led2: IC4.4 R12.2 | length 1.6
  Top w0.2: R12.2 11,16.573 11.15,16.423 IC4.4
User_Led3: IC4.37 R13.2 | length 1.6
  Top w0.2: IC4.37 10.35,8.2 10.65,7.9 R13.2
User_Led4: IC4.29 R14.2 | length 7
  Top w0.2: R14.2 3.175,5.125 3.825,5.775 3.825,7.15 5.125,8.45 6.2,8.45 6.575,8.825 IC4.29
pads on no net: IC1.8 IC3.9 IC4.2 IC4.3 IC4.5 IC4.7 IC4.9 IC4.11 IC4.12 IC4.16 IC4.17 IC4.18 IC4.26 IC4.27 IC4.30 IC4.34 IC4.35 IC4.36 IC4.38 IC4.39 IC4.40 IC4.41 X1.4

## Polygon pours and split planes (outlines as drawn)
GND on Bottom "GND_L02_P000" (solid, remove dead copper, pour order 0): 0,2 ccw(c2,2) 2,0 18,0 ccw(c18,2) 20,2 20,18 ccw(c18,18) 18,20 2,20 ccw(c2,18) 0,18
GND on Top "GND_L01_P001" (solid, pour order 1): 6.049,10.475 0,10.475 0,18 0.75,18.75 3.825,18.75 4.375,18.2 4.375,17.85 5.985,16.24

## Keep-outs
Keep-Out Layer:
  the board outline again, w0.254

## Other copper
Top:
  rectangle net GND: 5.65,13.275 5.775,13.875
  region net LEGO_VCC: 13.162,4.062 13.425,4.325 13.688,4.063
  region net 5V: 13.1,4.575 13.1,4.375 13.175,4.375 13.375,4.575
  region net 5V: 13.75,4.575 13.75,4.375 13.675,4.375 13.475,4.575
  pour cut-out: 3.862,12.875 4.287,12.875 4.287,13.125 3.862,13.125
  pour cut-out: 3.925,11.725 3.925,11.3 4.175,11.3 4.175,11.725
Bottom:
  rectangle net GND: 10.15,0.586 11.125,3.2
  rectangle net GND: 17.077,11.325 18.841,12.229

## Silkscreen, mask and mechanical layers (free items; w line width, h text height)
Bottom Overlay:
  text ".ProjectTitle .ProjectRevision" at 0.975,3.9 h1 r270